# Altium PCB NBP12 Xilinx Spartan-IIE BGA456 Rev1.00.PcbDoc (part 2 of 2)
Units mm, origin at the board's own origin, x right, y up, seen from the top; angles counter-clockwise.
Board outline 69 x 80.99 mm, 4 copper layers (Top Layer, MidLayer1, InternalPlane1, Bottom Layer); 54 components, 265 nets, 866 pads, 396 vias.
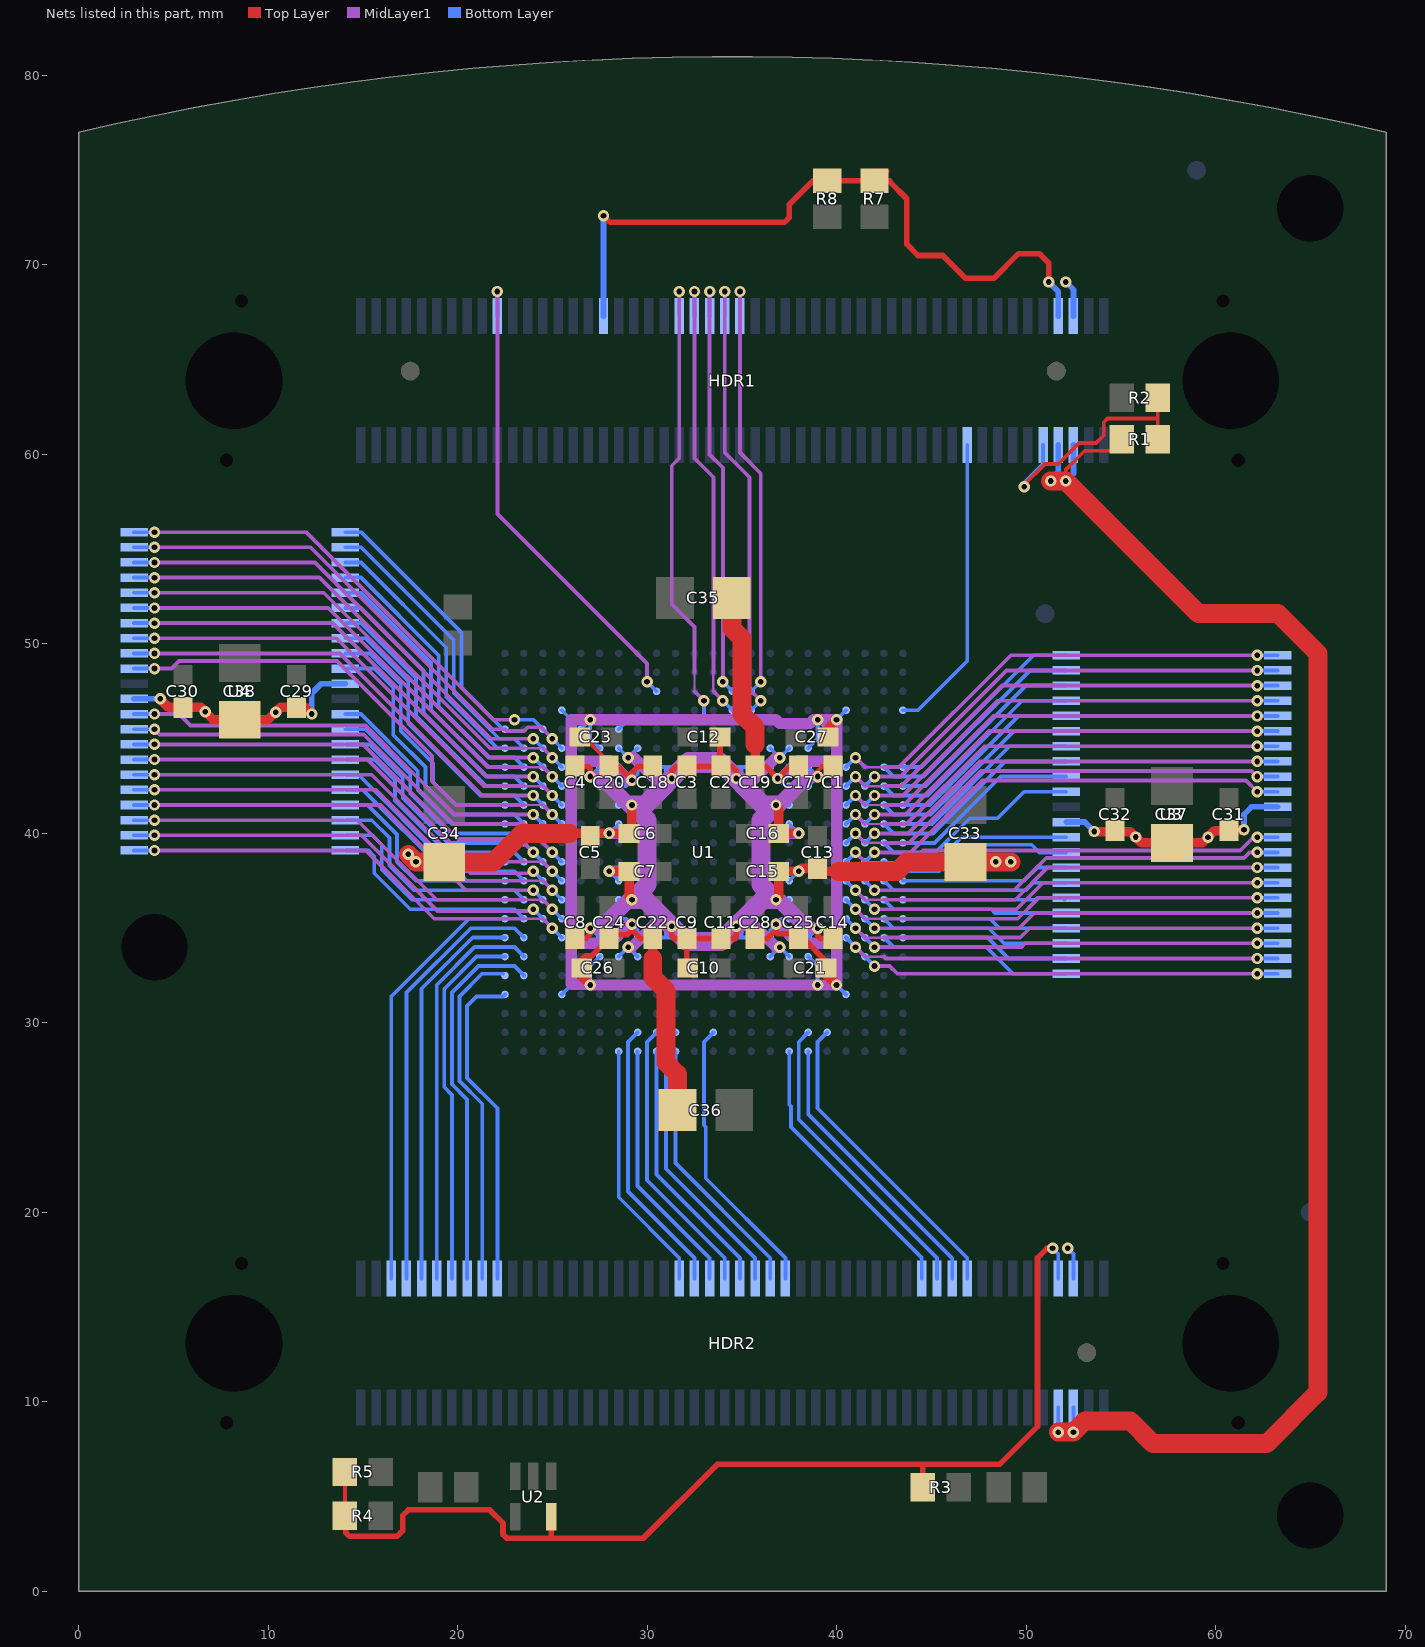
[diagram p4: the nets of this part, all layers, seen from the top]

## Via types
v1: diameter 0.6, hole 0.3, Top Layer to Bottom Layer, tented top, 396 vias

## Nets (pads, with @x,y where several pads share a name; then routed paths per layer and width w, separated by ;. In a path a pad name is that pad's centre, name@x,y a point inside that pad or via, vN(x,y) a via of type N, cw(c..) or ccw(c..) an arc to the next point about the centre after c; other vN are vias at no path point) (continued)
SP12: HDR2.82 U1.AA5 | length 16.5
  Bottom Layer w0.2: U1.AA5@39.5,29.5 39,29 39,25.5 46.9,17.6 HDR2.82@46.9,16.5
SP13: HDR2.80 U1.AB6 | length 15.1
  Bottom Layer w0.2: U1.AB6@38.5,28.5 38.5,25.2 46.1,17.6 HDR2.80@46.1,16.5
SP14: HDR2.78 U1.AA6 | length 16.2
  Bottom Layer w0.2: U1.AA6@38.5,29.5 38,29 38,24.9 45.3,17.6 HDR2.78@45.3,16.5
SP15: HDR2.76 U1.AB7 | length 14.9
  Bottom Layer w0.2: U1.AB7@37.5,28.5 37.5,25.7 37.6,25.6 37.6,24.5 44.5,17.6 HDR2.76@44.5,16.5
SPI_CLK: HDR1.46 U1.D10 | length 24.2
  MidLayer1 w0.127: 33.5,47.5 33.5,48.5
  MidLayer1 w0.2: v1(32.5,68.6) 32.5,59.8 33.5,58.8 33.5,48.5 ; 33.5,47.5 v1(34,47)
  Bottom Layer w0.2: HDR1.46@32.5,67.3 v1(32.5,68.6) ; v1(34,47) U1.D10@34.5,46.5
SPI_DIN: HDR1.44 U1.E16 | length 29.4
  MidLayer1 w0.127: 32.5,47.5 32.5,48.5
  MidLayer1 w0.2: v1(31.7,68.6) 31.7,59.8 31.3,59.4 31.3,52.1 32.5,50.9 32.5,48.5 ; 32.5,47.5 v1(33,47)
  Bottom Layer w0.2: U1.E16@28.5,45.5 29,46 32.8,46 33,46.2 v1(33,47) ; HDR1.44@31.7,67.3 v1(31.7,68.6)
SPI_DOUT: HDR1.50 U1.D9 | length 24.4
  MidLayer1 w0.2: v1(34.1,68.6) 34.1,60.1 35.4,58.8 35.4,47.6 v1(36,47)
  Bottom Layer w0.2: HDR1.50@34.1,67.3 v1(34.1,68.6) ; U1.D9@35.5,46.5 v1(36,47)
SPI_MODE: HDR1.52 U1.C9 | length 23.1
  MidLayer1 w0.2: v1(34.9,68.6) 34.9,60.1 36,59 v1(36,48)
  Bottom Layer w0.2: HDR1.52@34.9,67.3 v1(34.9,68.6) ; U1.C9@35.5,47.5 v1(36,48)
SPI_SEL: HDR1.48 U1.C10 | length 22.9
  MidLayer1 w0.2: v1(33.3,68.6) 33.3,60 34,59.3 v1(34,48)
  Bottom Layer w0.2: HDR1.48@33.3,67.3 v1(33.3,68.6) ; v1(34,48) U1.C10@34.5,47.5
SRAM0_A0: U1.J4 U3.5 | length 25.1
  MidLayer1 w0.127: 41.5,41.5 42.5,41.5
  MidLayer1 w0.2: v1(41,42) 41.5,41.5 ; 42.5,41.5 43.566,41.5 48.266,46.2 v1(62.2,46.2)
  Bottom Layer w0.2: U1.J4@40.5,41.5 v1(41,42) ; v1(62.2,46.2) U3.5@63.275,46.2
SRAM0_A1: U1.J3 U3.4 | length 24.1
  MidLayer1 w0.2: v1(42,42) 43.5,42 48.5,47 v1(62.2,47)
  Bottom Layer w0.2: U1.J3@41.5,41.5 v1(42,42) ; v1(62.2,47) U3.4@63.275,47
SRAM0_A2: U1.H4 U3.3 | length 25.4
  MidLayer1 w0.127: 41.5,42.5 42.5,42.5
  MidLayer1 w0.2: v1(41,43) 41.5,42.5 ; 42.5,42.5 43.434,42.5 48.734,47.8 v1(62.2,47.8)
  Bottom Layer w0.2: U1.H4@40.5,42.5 v1(41,43) ; v1(62.2,47.8) U3.3@63.275,47.8
SRAM0_A3: U1.H3 U3.2 | length 24.3
  MidLayer1 w0.2: v1(42,43) 43.369,43 48.969,48.6 v1(62.2,48.6)
  Bottom Layer w0.2: U1.H3@41.5,42.5 v1(42,43) ; v1(62.2,48.6) U3.2@63.275,48.6
SRAM0_A4: U1.G4 U3.1 | length 25.6
  MidLayer1 w0.127: 41.5,43.5 42.5,43.5
  MidLayer1 w0.2: v1(41,44) 41.5,43.5 ; 42.5,43.5 43.303,43.5 49.203,49.4 v1(62.2,49.4)
  Bottom Layer w0.2: U1.G4@40.5,43.5 v1(41,44) ; v1(62.2,49.4) U3.1@63.275,49.4
SRAM0_A5: U1.G1 U3.44 | length 11.1
  Bottom Layer w0.2: U1.G1@43.5,43.5 44.5,43.5 50.4,49.4 U3.44@52.125,49.4
SRAM0_A6: U1.G2 U3.43 | length 12.2
  Bottom Layer w0.2: U1.G2@42.5,43.5 43,43 44.6,43 50.2,48.6 U3.43@52.125,48.6
SRAM0_A7: U1.H1 U3.42 | length 10.8
  Bottom Layer w0.2: U1.H1@43.5,42.5 44.7,42.5 50,47.8 U3.42@52.125,47.8
SRAM0_A8: U1.P1 U3.28 | length 8.8
  Bottom Layer w0.2: U1.P1@43.5,36.5 50.5,36.5 50.6,36.6 U3.28@52.125,36.6 U3.28@52.025,36.5
SRAM0_A9: U1.P2 U3.27 | length 9.9
  Bottom Layer w0.2: U1.P2@42.5,36.5 43,36 48.163,36 48.363,35.8 U3.27@52.125,35.8
SRAM0_A10: U1.R1 U3.26 | length 8.8
  Bottom Layer w0.2: U1.R1@43.5,35.5 48.097,35.5 48.597,35 U3.26@52.125,35
SRAM0_A11: U1.R2 U3.25 | length 10.2
  Bottom Layer w0.2: U1.R2@42.5,35.5 43,35 48.031,35 48.831,34.2 U3.25@52.125,34.2
SRAM0_A12: U1.T1 U3.24 | length 9.1
  Bottom Layer w0.2: U1.T1@43.5,34.5 47.966,34.5 49.066,33.4 U3.24@52.125,33.4
SRAM0_A13: U1.T2 U3.23 | length 10.4
  Bottom Layer w0.2: U1.T2@42.5,34.5 43,34 47.9,34 49.3,32.6 U3.23@52.125,32.6
SRAM0_A14: U1.U3 U3.22 | length 22.1
  MidLayer1 w0.2: v1(42,33) 42.8,33 43.2,32.6 v1(62.2,32.6)
  Bottom Layer w0.2: U1.U3@41.5,33.5 v1(42,33) ; v1(62.2,32.6) U3.22@63.275,32.6
SRAM0_A15: U1.T4 U3.21 | length 23.2
  MidLayer1 w0.127: 41.5,33.5 42.5,33.5
  MidLayer1 w0.2: v1(41,34) 41.5,33.5 ; 42.5,33.5 42.6,33.4 v1(62.2,33.4)
  Bottom Layer w0.2: U1.T4@40.5,34.5 v1(41,34) ; v1(62.2,33.4) U3.21@63.275,33.4
SRAM0_A16: U1.T3 U3.20 | length 22.1
  MidLayer1 w0.2: v1(42,34) 49.76,34 49.96,34.2 v1(62.2,34.2)
  Bottom Layer w0.2: U1.T3@41.5,34.5 v1(42,34) ; v1(62.2,34.2) U3.20@63.275,34.2
SRAM0_A17: U1.R4 U3.19 | length 23.4
  MidLayer1 w0.127: 41.5,34.5 42.5,34.5
  MidLayer1 w0.2: v1(41,35) 41.5,34.5 ; 42.5,34.5 49.694,34.5 50.194,35 v1(62.2,35)
  Bottom Layer w0.2: U1.R4@40.5,35.5 v1(41,35) ; v1(62.2,35) U3.19@63.275,35
SRAM0_A18: U1.R3 U3.18 | length 22.3
  MidLayer1 w0.2: v1(42,35) 49.628,35 50.428,35.8 v1(62.2,35.8)
  Bottom Layer w0.2: U1.R3@41.5,35.5 v1(42,35) ; v1(62.2,35.8) U3.18@63.275,35.8
SRAM0_D0: U1.K4 U3.7 | length 24.9
  MidLayer1 w0.127: 41.5,40.5 42.5,40.5
  MidLayer1 w0.2: v1(41,41) 41.5,40.5 ; 42.5,40.5 43.697,40.5 47.797,44.6 v1(62.2,44.6)
  Bottom Layer w0.2: U1.K4@40.5,40.5 v1(41,41) ; v1(62.2,44.6) U3.7@63.275,44.6
SRAM0_D1: U1.L3 U3.8 | length 23.6
  MidLayer1 w0.2: v1(42,40) 43.763,40 46.034,42.271 47.563,43.8 v1(62.2,43.8)
  Bottom Layer w0.2: U1.L3@41.5,39.5 v1(42,40) ; v1(62.2,43.8) U3.8@63.275,43.8
SRAM0_D2: U1.L4 U3.9 | length 24.9
  MidLayer1 w0.127: 41.5,39.5 42.5,39.5
  MidLayer1 w0.2: v1(41,40) 41.5,39.5 ; 42.5,39.5 43.828,39.5 47.628,43.3 61.9,43.3 v1(62.2,43)
  Bottom Layer w0.2: U1.L4@40.5,39.5 v1(41,40) ; v1(62.2,43) U3.9@63.275,43
SRAM0_D3: U1.M3 U3.10 | length 23.8
  MidLayer1 w0.2: v1(42,39) 43.894,39 47.694,42.8 61.6,42.8 v1(62.2,42.2)
  Bottom Layer w0.2: U1.M3@41.5,38.5 v1(42,39) ; v1(62.2,42.2) U3.10@63.275,42.2
SRAM0_D4: U1.M4 U3.13 | length 23.8
  MidLayer1 w0.2: v1(41,39) 41.564,38.436 43.896,38.436 44.56,39.1 61.3,39.1 62,39.8 v1(62.2,39.8)
  Bottom Layer w0.2: U1.M4@40.5,38.5 v1(41,39) ; v1(62.2,39.8) U3.13@63.275,39.8
SRAM0_D5: U1.N3 U3.14 | length 22.8
  MidLayer1 w0.2: v1(42,37) 49.366,37 51.066,38.7 61.5,38.7 61.8,39 v1(62.2,39)
  Bottom Layer w0.2: U1.N3@41.5,37.5 v1(42,37) ; v1(62.2,39) U3.14@63.275,39
SRAM0_D6: U1.N4 U3.15 | length 23.9
  MidLayer1 w0.127: 41.5,36.5 42.5,36.5
  MidLayer1 w0.2: v1(41,37) 41.5,36.5 ; 42.5,36.5 49.431,36.5 51.131,38.2 v1(62.2,38.2)
  Bottom Layer w0.2: U1.N4@40.5,37.5 v1(41,37) ; v1(62.2,38.2) U3.15@63.275,38.2
SRAM0_D7: U1.P3 U3.16 | length 22.6
  MidLayer1 w0.2: v1(42,36) 49.497,36 50.897,37.4 v1(62.2,37.4)
  Bottom Layer w0.2: U1.P3@41.5,36.5 v1(42,36) ; v1(62.2,37.4) U3.16@63.275,37.4
SRAM0_D8: U1.N2 U3.29 | length 10
  Bottom Layer w0.2: U1.N2@42.5,37.5 43,37 50,37 50.4,37.4 U3.29@52.125,37.4
SRAM0_D9: U1.N1 U3.30 | length 8.9
  Bottom Layer w0.2: U1.N1@43.5,37.5 49.9,37.5 50.6,38.2 U3.30@52.125,38.2
SRAM0_D10: U1.M2 U3.31 | length 10.6
  Bottom Layer w0.2: U1.M2@42.5,38.5 43,38 45.4,38 46.8,39.4 50.3,39.4 50.7,39 U3.31@52.125,39
SRAM0_D11: U1.M1 U3.32 | length 9.2
  Bottom Layer w0.2: U1.M1@43.5,38.5 45.294,38.5 46.594,39.8 U3.32@52.125,39.8
SRAM0_D12: U1.L2 U3.35 | length 11.2
  Bottom Layer w0.2: U1.L2@42.5,39.5 43,39 45.228,39 47.028,40.8 48.5,40.8 49.9,42.2 U3.35@52.125,42.2
SRAM0_D13: U1.L1 U3.36 | length 10.1
  Bottom Layer w0.2: U1.L1@43.5,39.5 45.163,39.5 48.663,43 U3.36@52.125,43
SRAM0_D14: U1.K2 U3.37 | length 11.4
  Bottom Layer w0.2: U1.K2@42.5,40.5 43,40 45.097,40 48.897,43.8 U3.37@52.125,43.8
SRAM0_D15: U1.K1 U3.38 | length 10.3
  Bottom Layer w0.2: U1.K1@43.5,40.5 45.031,40.5 49.131,44.6 U3.38@52.125,44.6
SRAM0_E: U1.K3 U3.6 | length 23.8
  MidLayer1 w0.2: v1(42,41) 43.631,41 48.031,45.4 v1(62.2,45.4)
  Bottom Layer w0.2: U1.K3@41.5,40.5 v1(42,41) ; v1(62.2,45.4) U3.6@63.275,45.4
SRAM0_LB: U1.J2 U3.39 | length 11.7
  Bottom Layer w0.2: U1.J2@42.5,41.5 43,41 44.966,41 49.366,45.4 U3.39@52.125,45.4
SRAM0_OE: U1.H2 U3.41 | length 11.9
  Bottom Layer w0.2: U1.H2@42.5,42.5 43,42 44.8,42 49.8,47 U3.41@52.125,47
SRAM0_UB: U1.J1 U3.40 | length 10.6
  Bottom Layer w0.2: U1.J1@43.5,41.5 44.9,41.5 49.6,46.2 U3.40@52.125,46.2
SRAM0_W: U1.P4 U3.17 | length 23.6
  MidLayer1 w0.127: 41.5,35.5 42.5,35.5
  MidLayer1 w0.2: v1(41,36) 41.5,35.5 ; 42.5,35.5 49.563,35.5 50.663,36.6 v1(62.2,36.6)
  Bottom Layer w0.2: U1.P4@40.5,36.5 v1(41,36) ; v1(62.2,36.6) U3.17@63.275,36.6
SRAM1_A0: U1.G22 U4.5 | length 13.7
  Bottom Layer w0.2: U4.5@14.075,52.7 14.9,52.7 18.6,49 18.6,46.531 21.631,43.5 U1.G22@22.5,43.5
SRAM1_A1: U1.G21 U4.4 | length 15.2
  Bottom Layer w0.2: U4.4@14.075,53.5 14.9,53.5 19,49.4 19,46.697 21.697,44 23,44 U1.G21@23.5,43.5
SRAM1_A2: U1.F22 U4.3 | length 14
  Bottom Layer w0.2: U4.3@14.075,54.3 14.9,54.3 19.4,49.8 19.4,47.2 22.1,44.5 U1.F22@22.5,44.5
SRAM1_A3: U1.F21 U4.2 | length 15.5
  Bottom Layer w0.2: U4.2@14.075,55.1 14.9,55.1 19.8,50.2 19.8,47.4 22.2,45 23,45 U1.F21@23.5,44.5
SRAM1_A4: U1.E22 U4.1 | length 14.4
  Bottom Layer w0.2: U4.1@14.075,55.9 14.9,55.9 20.2,50.6 20.2,47.7 22.4,45.5 U1.E22@22.5,45.5
SRAM1_A5: U1.E20 U4.44 | length 26.6
  MidLayer1 w0.2: v1(4,55.9) 12,55.9 21.9,46 v1(23,46)
  Bottom Layer w0.2: U4.44@2.925,55.9 v1(4,55.9) ; v1(23,46) 24,46 ; 24,46 U1.E20@24.5,45.5 24,46
SRAM1_A6: U1.F19 U4.43 | length 27.1
  MidLayer1 w0.2: v1(4,55.1) 12.234,55.1 21.834,45.5 22.5,45.5 22.6,45.4 23.5,45.4 23.7,45.6 24.4,45.6 v1(25,45)
  Bottom Layer w0.2: U4.43@2.925,55.1 v1(4,55.1) ; v1(25,45) U1.F19@25.5,44.5
SRAM1_A7: U1.F20 U4.42 | length 25.6
  MidLayer1 w0.2: v1(4,54.3) 12.469,54.3 21.769,45 v1(24,45)
  Bottom Layer w0.2: U4.42@2.925,54.3 v1(4,54.3) ; v1(24,45) U1.F20@24.5,44.5
SRAM1_A8: U1.N20 U4.28 | length 24
  MidLayer1 w0.2: v1(4,43.1) 15.472,43.1 20.672,37.9 23.9,37.9 v1(24,38)
  Bottom Layer w0.2: U4.28@2.925,43.1 v1(4,43.1) ; v1(24,38) U1.N20@24.5,37.5
SRAM1_A9: U1.P19 U4.27 | length 25
  MidLayer1 w0.127: 23.5,37.5 24.5,37.5
  MidLayer1 w0.2: v1(4,42.3) 15.706,42.3 20.506,37.5 23.5,37.5 ; 24.5,37.5 v1(25,37)
  Bottom Layer w0.2: U4.27@2.925,42.3 v1(4,42.3) ; v1(25,37) U1.P19@25.5,36.5
SRAM1_A10: U1.P20 U4.26 | length 23.6
  MidLayer1 w0.2: v1(4,41.5) 15.94,41.5 20.44,37 v1(24,37)
  Bottom Layer w0.2: U4.26@2.925,41.5 v1(4,41.5) ; v1(24,37) U1.P20@24.5,36.5
SRAM1_A11: U1.R19 U4.25 | length 24.7
  MidLayer1 w0.127: 23.5,36.5 24.5,36.5
  MidLayer1 w0.2: v1(4,40.7) 14.7,40.7 18.9,36.5 23.5,36.5 ; 24.5,36.5 v1(25,36)
  Bottom Layer w0.2: U4.25@2.925,40.7 v1(4,40.7) ; v1(25,36) U1.R19@25.5,35.5
SRAM1_A12: U1.R20 U4.24 | length 23.5
  MidLayer1 w0.2: v1(4,39.9) 14.934,39.9 18.934,35.9 23.9,35.9 v1(24,36)
  Bottom Layer w0.2: U4.24@2.925,39.9 v1(4,39.9) ; v1(24,36) U1.R20@24.5,35.5
SRAM1_A13: U1.T19 U4.23 | length 24.5
  MidLayer1 w0.127: 23.5,35.5 24.5,35.5
  MidLayer1 w0.2: v1(4,39.1) 15.169,39.1 18.769,35.5 23.5,35.5 ; 24.5,35.5 v1(25,35)
  Bottom Layer w0.2: U4.23@2.925,39.1 v1(4,39.1) ; v1(25,35) U1.T19@25.5,34.5
SRAM1_A14: U1.R21 U4.22 | length 11.4
  Bottom Layer w0.2: U4.22@14.075,39.1 15.3,39.1 15.6,38.8 15.6,37.9 17.5,36 23,36 U1.R21@23.5,35.5
SRAM1_A15: U1.P22 U4.21 | length 10.6
  Bottom Layer w0.2: U4.21@14.075,39.9 15.5,39.9 16,39.4 16,38.1 17.6,36.5 U1.P22@22.5,36.5
SRAM1_A16: U1.P21 U4.20 | length 12
  Bottom Layer w0.2: U4.20@14.075,40.7 15.472,40.7 16.4,39.772 16.4,38.3 17.7,37 23,37 U1.P21@23.5,36.5
SRAM1_A17: U1.N22 U4.19 | length 10.9
  Bottom Layer w0.2: U4.19@14.075,41.5 15.237,41.5 16.8,39.937 16.8,38.5 17.8,37.5 U1.N22@22.5,37.5
SRAM1_A18: U1.N21 U4.18 | length 11.4
  Bottom Layer w0.2: U4.18@14.075,42.3 15.003,42.3 19.303,38 23,38 U1.N21@23.5,37.5
SRAM1_D0: U1.H22 U4.7 | length 13.2
  Bottom Layer w0.2: U4.7@14.075,51.1 14.9,51.1 17.8,48.2 17.8,46.2 21.5,42.5 U1.H22@22.5,42.5
SRAM1_D1: U1.J21 U4.8 | length 14.4
  Bottom Layer w0.2: U4.8@14.075,50.3 15.134,50.3 17.4,48.034 17.4,45.8 21.2,42 23,42 U1.J21@23.5,41.5
SRAM1_D2: U1.J22 U4.9 | length 13.8
  Bottom Layer w0.2: U4.9@14.075,49.5 15.369,49.5 17,47.869 17,45.4 18.7,43.7 18.7,42.7 19.9,41.5 U1.J22@22.5,41.5
SRAM1_D3: U1.K21 U4.10 | length 14.9
  Bottom Layer w0.2: U4.10@14.075,48.7 15.603,48.7 16.6,47.703 16.6,45.2 18.3,43.5 18.3,42.5 19.8,41 23,41 U1.K21@23.5,40.5
SRAM1_D4: U1.K22 U4.13 | length 11.4
  Bottom Layer w0.2: U4.13@14.075,46.3 14.9,46.3 17.9,43.3 17.9,42.3 19.7,40.5 U1.K22@22.5,40.5
SRAM1_D5: U1.L21 U4.14 | length 12.5
  Bottom Layer w0.2: U4.14@14.075,45.5 15.134,45.5 17.5,43.134 17.5,42.1 19.6,40 23,40 U1.L21@23.5,39.5
SRAM1_D6: U1.L22 U4.15 | length 11.2
  Bottom Layer w0.2: U4.15@14.075,44.7 15.369,44.7 17.1,42.969 17.1,41.9 19.5,39.5 U1.L22@22.5,39.5
SRAM1_D7: U1.M21 U4.16 | length 12.3
  Bottom Layer w0.2: U4.16@14.075,43.9 15.603,43.9 16.7,42.803 16.7,41.734 19.434,39 23,39 U1.M21@23.5,38.5
SRAM1_D8: U1.N19 U4.29 | length 25.2
  MidLayer1 w0.127: 23.5,38.5 24.5,38.5
  MidLayer1 w0.2: v1(4,43.9) 15.237,43.9 20.637,38.5 23.5,38.5 ; 24.5,38.5 v1(25,38)
  Bottom Layer w0.2: U4.29@2.925,43.9 v1(4,43.9) ; v1(25,38) U1.N19@25.5,37.5
SRAM1_D9: U1.M20 U4.30 | length 24.1
  MidLayer1 w0.2: v1(4,44.7) 15.003,44.7 20.003,39.7 23.3,39.7 v1(24,39)
  Bottom Layer w0.2: U4.30@2.925,44.7 v1(4,44.7) ; v1(24,39) U1.M20@24.5,38.5
SRAM1_D10: U1.M19 U4.31 | length 25.5
  MidLayer1 w0.2: v1(4,45.5) 4.275,45.225 15.044,45.225 19.769,40.5 23.5,40.5 v1(25,39)
  Bottom Layer w0.2: U4.31@2.925,45.5 v1(4,45.5) ; v1(25,39) U1.M19@25.5,38.5
SRAM1_D11: U1.K20 U4.32 | length 24
  MidLayer1 w0.2: v1(4,46.3) 5.3,46.3 5.9,45.7 15.134,45.7 17.634,43.2 19.834,41 v1(24,41)
  Bottom Layer w0.2: U4.32@2.925,46.3 v1(4,46.3) ; v1(24,41) U1.K20@24.5,40.5
SRAM1_D12: U1.K19 U4.35 | length 27.1
  MidLayer1 w0.127: 23.5,41.5 24.5,41.5
  MidLayer1 w0.2: v1(4,48.7) 4.9,48.7 5.3,49.1 13.634,49.1 18.649,44.085 18.649,42.751 19.9,41.5 23.5,41.5 ; 24.5,41.5 v1(25,41)
  Bottom Layer w0.2: U4.35@2.925,48.7 v1(4,48.7) ; v1(25,41) U1.K19@25.5,40.5
SRAM1_D13: U1.J20 U4.36 | length 24.9
  MidLayer1 w0.2: v1(4,49.5) 13.8,49.5 21.3,42 v1(24,42)
  Bottom Layer w0.2: U4.36@2.925,49.5 v1(4,49.5) ; v1(24,42) U1.J20@24.5,41.5
SRAM1_D14: U1.J19 U4.37 | length 26.2
  MidLayer1 w0.127: 23.5,42.5 24.5,42.5
  MidLayer1 w0.2: v1(4,50.3) 13.6,50.3 21.4,42.5 23.5,42.5 ; 24.5,42.5 v1(25,42)
  Bottom Layer w0.2: U4.37@2.925,50.3 v1(4,50.3) ; v1(25,42) U1.J19@25.5,41.5
SRAM1_D15: U1.H20 U4.38 | length 25.1
  MidLayer1 w0.2: v1(4,51.1) 13.406,51.1 21.506,43 v1(24,43)
  Bottom Layer w0.2: U4.38@2.925,51.1 v1(4,51.1) ; v1(24,43) U1.H20@24.5,42.5
SRAM1_E: U1.H21 U4.6 | length 14.6
  Bottom Layer w0.2: U4.6@14.075,51.9 14.9,51.9 18.2,48.6 18.2,46.366 21.566,43 23,43 U1.H21@23.5,42.5
SRAM1_LB: U1.H19 U4.39 | length 26.5
  MidLayer1 w0.127: 23.5,43.5 24.5,43.5
  MidLayer1 w0.2: v1(4,51.9) 13.172,51.9 21.572,43.5 23.5,43.5 ; 24.5,43.5 v1(25,43)
  Bottom Layer w0.2: U4.39@2.925,51.9 v1(4,51.9) ; v1(25,43) U1.H19@25.5,42.5
SRAM1_OE: U1.G19 U4.41 | length 26.7
  MidLayer1 w0.127: 23.5,44.5 24.5,44.5
  MidLayer1 w0.2: v1(4,53.5) 12.703,53.5 21.703,44.5 23.5,44.5 ; 24.5,44.5 v1(25,44)
  Bottom Layer w0.2: U4.41@2.925,53.5 v1(4,53.5) ; v1(25,44) U1.G19@25.5,43.5
SRAM1_UB: U1.G20 U4.40 | length 25.4
  MidLayer1 w0.2: v1(4,52.7) 12.937,52.7 21.637,44 v1(24,44)
  Bottom Layer w0.2: U4.40@2.925,52.7 v1(4,52.7) ; v1(24,44) U1.G20@24.5,43.5
SRAM1_W: U1.M22 U4.17 | length 10.3
  Bottom Layer w0.2: U4.17@14.075,43.1 14.769,43.1 19.369,38.5 U1.M22@22.5,38.5
SW0: HDR2.44 U1.AB16 | length 13.3
  Bottom Layer w0.2: U1.AB16@28.5,28.5 28.5,20.8 31.7,17.6 HDR2.44@31.7,16.5
SW1: HDR2.46 U1.AA15 | length 14.7
  Bottom Layer w0.2: U1.AA15@29.5,29.5 29,29 29,21.1 32.5,17.6 HDR2.46@32.5,16.5
SW2: HDR2.48 U1.AB15 | length 13.6
  Bottom Layer w0.2: U1.AB15@29.5,28.5 29.5,21.4 33.3,17.6 HDR2.48@33.3,16.5
SW3: HDR2.50 U1.AA14 | length 14.9
  Bottom Layer w0.2: U1.AA14@30.5,29.5 30,29 30,21.7 34.1,17.6 HDR2.50@34.1,16.5
SW4: HDR2.52 U1.AB14 | length 13.8
  Bottom Layer w0.2: U1.AB14@30.5,28.5 30.5,22 34.9,17.6 HDR2.52@34.9,16.5
SW5: HDR2.54 U1.AA13 | length 15.2
  Bottom Layer w0.2: U1.AA13@31.5,29.5 31,29 31,22.3 35.7,17.6 HDR2.54@35.7,16.5
SW6: HDR2.56 U1.AB13 | length 14.1
  Bottom Layer w0.2: U1.AB13@31.5,28.5 31.5,22.6 36.5,17.6 HDR2.56@36.5,16.5
SW7: HDR2.58 U1.AA11 | length 15
  Bottom Layer w0.2: U1.AA11@33.5,29.5 33,29 33,24.6 33.1,24.5 33.1,21.8 37.3,17.6 HDR2.58@37.3,16.5
SWC0: HDR2.18 U1.V22 | length 18.2
  Bottom Layer w0.2: HDR2.18@21.3,16.5 21.3,25.731 20.1,26.931 20.1,31.4 21.3,32.6 U1.V22@22.4,32.6
SWC1: HDR2.16 U1.V21 | length 20
  Bottom Layer w0.2: HDR2.16@20.5,16.5 20.5,25.966 19.7,26.766 19.7,31.6 21.1,33 23,33 U1.V21@23.5,32.5
SWC2: HDR2.14 U1.U22 | length 19.4
  Bottom Layer w0.2: HDR2.14@19.7,16.5 19.7,26.2 19.3,26.6 19.3,31.8 21,33.5 U1.U22@22.5,33.5
SWC3: HDR2.6 U1.R22 | length 22.6
  Bottom Layer w0.2: HDR2.6@16.5,16.5 16.5,31.4 20.6,35.5 U1.R22@22.5,35.5
SWR0: HDR2.20 U1.W22 | length 17.3
  Bottom Layer w0.2: HDR2.20@22.1,16.5 22.1,25.497 20.5,27.097 20.5,30.9 21,31.4 22.4,31.4 U1.W22@22.5,31.5
SWR1: HDR2.12 U1.U21 | length 21.1
  Bottom Layer w0.2: HDR2.12@18.9,16.5 18.9,32 20.9,34 23,34 U1.U21@23.5,33.5
SWR2: HDR2.10 U1.T22 | length 20.8
  Bottom Layer w0.2: HDR2.10@18.1,16.5 18.1,31.8 20.8,34.5 U1.T22@22.5,34.5
SWR3: HDR2.8 U1.T21 | length 22.9
  Bottom Layer w0.2: HDR2.8@17.3,16.5 17.3,31.6 20.7,35 23,35 U1.T21@23.5,34.5
TEST: HDR1.81 U1.D1 | length 15.9
  Bottom Layer w0.2: U1.D1@43.5,46.5 44.3,46.5 46.9,49.1 HDR1.81@46.9,60.5
VCC: C1.2 C2.2 C3.2 C4.2 C5.2 C6.2 C7.2 C8.2 C9.2 C10.2 C11.2 C12.2 C13.2 C14.2 C15.2 C16.2 C29.2 C30.2 C31.2 C32.2 C33.1 C34.1 C37.1 C38.1 HDR1.34 HDR1.94 HDR1.96 HDR2.94 HDR2.96 R3.1 R4.1 R5.1 R7.1 R8.1 U1.F7 U1.F8 U1.F15 U1.F16 U1.G6 U1.G9 U1.G10 U1.G13 U1.G14 U1.G17 U1.H6 U1.H17 U1.J7 U1.J16 U1.K7 U1.K16 U1.N7 U1.N16 U1.P7 U1.P16 U1.R6 U1.R17 U1.T6 U1.T9 U1.T10 U1.T13 U1.T14 U1.T17 U1.U7 U1.U8 U1.U15 U1.U16 U2.5 U3.11 U3.33 U4.11 U4.33 | length 272.9
  Top Layer w0.2: R4.1@14.05,4 R5.1@14.05,6.3 ; v1(39,43) 39,43.3 39.25,43.55
  Top Layer w0.3: R4.1@14.05,4 14.1,3.95 14.1,3.1 14.3,2.9 16.8,2.9 17.1,3.2 17.1,4 17.4,4.3 21.7,4.3 22.4,3.6 22.4,3 22.6,2.8 29.8,2.8 33.7,6.7 48.6,6.7 50.6,8.7 50.6,17.6 51.1,18.1 v1(51.4,18.1) ; 24.9,2.8 24.95,2.85 U2.5@24.95,3.925 ; C4.2@26.2,43.55 26.85,43.55 27,43.4 v1(27,43) ; 26.75,34.45 27,34.7 v1(27,35) ; v1(27.7,72.6) 28.05,72.25 37.25,72.25 37.5,72.5 37.5,73.2 38.75,74.45 R8.1@39.5,74.45 42.8,74.45 42.8,74.4 43.7,73.5 43.7,71.1 44.3,70.5 45.6,70.5 46.8,69.3 48.3,69.3 49.6,70.6 50.7,70.6 51.2,70.1 v1(51.2,69.1) ; v1(31.3,35.1) 31.3,34.6 31.45,34.45 C9.2@32.1,34.45 ; v1(31.3,42.9) 31.3,43.3 31.55,43.55 C3.2@32.1,43.55 C2.2@33.9,43.55 34.45,43.55 34.7,43.3 v1(34.7,42.9) ; C10.2@32.15,32.9 32.1,32.95 C9.2@32.1,34.45 ; C2.2@33.85,43.6 C12.2@33.85,45.1 ; v1(34.7,35.1) 34.7,34.5 34.65,34.45 C11.2@33.9,34.45 C9.2@32.1,34.45 ; v1(38,38) v1@38.15,38.15 ; v1(39,35) 39,34.6 39.15,34.45 C14.2@39.8,34.45 ; 39.25,43.55 C1.2@39.8,43.55 ; R7.1@42,74.95 R7.1@42.65,74.95 ; R3.1@44.55,5.5 44.55,6.65
  Top Layer w0.5: v1(4.3,47.1) 4.75,46.65 C30.2@5.5,46.65 6.45,46.65 7.1,46 C38.1@8.5,46 10,46 10.65,46.65 11.95,46.65 v1(12.3,46.3) ; 25.9,40 26.85,40 C5.2@27,39.85 27.15,40 C6.2@29.05,40 29.2,40.15 v1(29.2,41.5) ; v1(28,38) C7.2@29.05,38 29.05,36.65 v1(29.2,36.5) ; v1(36.8,36.5) 36.95,36.65 C15.2@36.95,38 v1(38,38) ; v1(36.8,41.5) 36.95,41.35 C16.2@36.95,40 v1(38,40) ; v1@38.15,38.15 C13.2@39,38.15 39.15,38 40.1,38 ; C33.1@46.8,38.5 v1(48.4,38.5) ; v1(53.6,40.1) 54.65,40.1 55.5,40.1 56.1,39.5 C37.1@57.7,39.5 59.3,39.5 59.95,40.15 C31.2@60.7,40.15 60.75,40.2 v1(61.5,40.2)
  Top Layer w1: v1(17.4,38.9) v1(17.8,38.5) 21.9,38.5 23.4,40 25.9,40 ; 40.1,38 43.2,38 43.7,38.5 C33.1@46.8,38.5 v1(48.4,38.5) v1(49.2,38.5)
  MidLayer1 w0.6: v1(27,35) 27.7,35 v1(29.2,36.5) ; v1(27,43) 27.7,43 29.8,40.9 ; 27.4,35 29.05,36.65 v1@29.2,36.8 ; 27.4,43 v1@29.1,41.3 ; v1(28,38) 29.8,38 ; v1(28,40) 29.8,40 ; v1(29,34) 29.2,34 30.8,35.6 ; v1(29,44) 29.3,44 30.841,42.459 30.841,42.441 ; v1(31.3,42.9) 31.9,43.5 34.1,43.5 v1(34.7,42.9) ; 35.202,35.602 35.202,35.598 36.8,34 v1(37,34) ; 35.22,42.38 35.22,42.42 36.8,44 v1(37,44) ; 36.2,40 v1(38,40) ; 36.8,41.2 36.95,41.35 38.6,43 ; v1(36.8,41.5) 38.3,43 v1(39,43) ; 38.6,35 37.1,36.5 v1(36.8,36.5) 38.3,35 v1(39,35)
  MidLayer1 w1: v1(29.2,36.5) 30,37.3 30,40.7 v1(29.2,41.5) 29.9,41.5 32.2,43.8 33.8,43.8 36.1,41.5 v1(36.8,41.5) 36,40.7 36,37.3 v1(36.8,36.5) 36.1,36.5 33.9,34.3 32.1,34.3 29.9,36.5 v1(29.2,36.5)
  Bottom Layer w0.2: U1.T17@27.5,34.5 v1(27,35) U1.R17@27.5,35.5 ; U1.H17@27.5,42.5 v1(27,43) U1.G17@27.5,43.5 ; v1(28,38) U1.N16@28.5,37.5 ; v1(28,40) U1.K16@28.5,40.5 ; U1.U16@28.5,33.5 v1(29,34) U1.U15@29.5,33.5 ; U1.P16@28.5,36.5 v1(29.2,36.5) ; U1.J16@28.5,41.5 v1(29.2,41.5) ; U1.F16@28.5,44.5 v1(29,44) U1.F15@29.5,44.5 ; U1.T14@30.5,34.5 U1.T13@31.5,34.5 ; U1.G14@30.5,43.5 U1.G13@31.5,43.5 ; 31,34.5 31,34.8 v1(31.3,35.1) ; 31,43.5 31,43.2 v1(31.3,42.9) ; U1.T10@34.5,34.5 U1.T9@35.5,34.5 ; U1.G10@34.5,43.5 U1.G9@35.5,43.5 ; v1(34.7,35.1) 35,34.8 35,34.5 ; v1(34.7,42.9) 35,43.2 35,43.5 ; U1.U8@36.5,33.5 v1(37,34) U1.U7@37.5,33.5 ; U1.F8@36.5,44.5 v1(37,44) U1.F7@37.5,44.5 ; v1(36.8,36.5) U1.P7@37.5,36.5 ; v1(36.8,41.5) U1.J7@37.5,41.5 ; U1.N7@37.5,37.5 v1(38,38) ; U1.K7@37.5,40.5 v1(38,40) ; U1.T6@38.5,34.5 v1(39,35) U1.R6@38.5,35.5 ; U1.H6@38.5,42.5 v1(39,43) U1.G6@38.5,43.5 ; v1(51.4,18.1) 51.7,17.8 HDR2.94@51.7,16.5 ; v1(52.2,18.1) 52.5,17.8 HDR2.96@52.5,16.5
  Bottom Layer w0.3: U4.33@2.925,47.1 v1(4.3,47.1) ; 12.3,46.6 12.3,47.4 12.8,47.9 U4.11@14.075,47.9 ; HDR1.34@27.7,67.3 v1(27.7,72.6) ; v1(51.2,69.1) 51.7,68.6 HDR1.94@51.7,67.3 ; v1(52.1,69.1) 52.5,68.7 HDR1.96@52.5,67.3 ; U3.33@52.125,40.6 53.1,40.6 v1(53.6,40.1) ; v1(61.5,40.2) 61.5,41 61.9,41.4 U3.11@63.275,41.4
  other v1: 55.786,39.814 59.6,39.8 10.4,46.4 6.679,46.421
VCCINT: C17.2 C18.2 C19.2 C20.2 C21.2 C22.2 C23.2 C24.2 C25.2 C26.2 C27.2 C28.2 C35.1 C36.1 HDR1.93 HDR1.95 HDR2.93 HDR2.95 R1.1 U1.D4 U1.D19 U1.E5 U1.E18 U1.F6 U1.F17 U1.G7 U1.G8 U1.G15 U1.G16 U1.H7 U1.H16 U1.R7 U1.R16 U1.T7 U1.T8 U1.T15 U1.T16 U1.U6 U1.U17 U1.V5 U1.V18 U1.W4 U1.W19 | length 222.3
  Top Layer w0.2: C23.2@26.65,45.1 C20.2@28.1,43.65 ; v1(52.1,58.6) 52.1,59.2 53.1,60.2 54.45,60.2 R1.1@55.05,60.8
  Top Layer w0.3: C26.2@26.55,33.35 26.75,33.55 27.1,33.55 28.198,34.648 28.948,34.648 v1@29.2,34.9 ; C20.2@28.45,43.55 v1(29.2,42.8) 29.2,43.2 29.55,43.55 C18.2@30.3,43.55 ; v1(29.2,35.2) v1@29.2,34.9 ; C22.2@30.3,34.45 29.65,34.45 29.2,34.9 ; C28.2@35.7,34.45 36.35,34.45 36.8,34.9 ; C19.2@35.7,43.55 36.25,43.55 v1(36.9,42.9) C17.2@37.55,43.55 ; v1(36.8,35.2) 36.8,34.8 36.9,34.7 38,34.7 C25.2@38,34.45 38.25,34.45 C21.2@39.45,33.25
  Top Layer w0.5: C26.2@26.55,32.9 26.55,32.45 v1(27,32) ; C22.2@30.3,33.9 C22.2@30.3,34.45 ; C19.2@35.7,43.55 35.7,44.3 ; C21.2@39.45,32.9 39.45,32.55 v1(39.997,32.003) ; C27.2@39.55,45.1 39.55,45.55 v1(40,46)
  Top Layer w1: 30.3,33.4 30.3,32.4 31,31.7 31,27.9 31.6,27.3 C36.1@31.6,25.4 ; C35.1@34.471,52.429 34.471,50.829 35,50.3 35,46.3 35.7,45.6 35.7,44.7 ; v1(51.3,58.6) v1(52.1,58.6) 59.1,51.6 63.3,51.6 65.4,49.5 65.4,10.5 62.7,7.8 56.7,7.8 55.5,9 53.1,9 v1(52.5,8.4) v1(51.7,8.4)
  MidLayer1 w0.6: 26,32.059 26,36.3 26,41.7 26,46 ; 26,34.2 28.031,34.2 29.031,35.2 v1(29.2,35.2) ; 26,43.8 28.031,43.8 29.031,42.8 v1(29.2,42.8) ; 26.029,32.029 v1@26.97,32.029 ; 26.031,46 35.869,46 36.8,46 37,45.8 38.6,45.8 38.8,46 v1(40,46) ; 29,32 v1(27,32) v1@40,32 ; v1(36.8,35.2) 36.969,35.2 37.969,34.2 40,34.2 ; v1@40,32.005 40,34.2 ; 40,43.8 37.969,43.8 v1@37.069,42.9 ; v1@40,45.831 v1(40,46) ; v1@37.069,42.9 v1(36.9,42.9) v1@37.069,42.9 ; 40,34.2 v1(40,46)
  Bottom Layer w0.2: U1.W19@25.5,31.5 26,32 v1(27,32) ; U1.D19@25.5,46.5 26,46 v1(27,46) ; U1.V18@26.5,32.5 v1(27,32) ; U1.E18@26.5,45.5 v1(27,46) ; U1.U17@27.5,33.5 27,33 v1(27,32) ; U1.F17@27.5,44.5 27,45 v1(27,46) ; U1.R16@28.5,35.5 28.9,35.5 v1(29.2,35.2) ; U1.H16@28.5,42.5 28.9,42.5 v1(29.2,42.8) ; U1.G16@28.5,43.5 v1(29.2,42.8) ; U1.T16@28.6,34.6 U1.T16@28.5,34.5 v1(29.2,35.2) ; U1.T15@29.5,34.5 29.5,34.9 v1(29.2,35.2) ; U1.G15@29.5,43.5 29.5,43.1 v1(29.2,42.8) ; U1.T8@36.5,34.5 36.5,34.9 v1(36.8,35.2) ; U1.G8@36.5,43.5 36.5,43.3 v1(36.9,42.9) ; U1.T7@37.5,34.5 v1(36.8,35.2) ; U1.R7@37.5,35.5 37.1,35.5 v1(36.8,35.2) ; U1.H7@37.5,42.5 37.3,42.5 v1(36.9,42.9) ; U1.G7@37.5,43.5 v1(36.9,42.9) ; U1.U6@38.5,33.5 39,33 ; U1.F6@38.5,44.5 39,45 v1(39,46) ; v1@39,32.2 39,33 ; U1.V5@39.5,32.5 v1(39.997,32.003) ; U1.E5@39.5,45.5 v1(39,46) ; v1@39.995,32 v1(39,32) 39,33 ; v1@40,32 U1.W4@40.5,31.5 ; U1.D4@40.5,46.5 v1(40,46) v1(39,46) ; v1(51.7,8.4) HDR2.93@51.7,9.7 ; v1(52.5,8.4) HDR2.95@52.5,9.7
  Bottom Layer w0.3: v1(51.3,58.6) 51.7,59 HDR1.93@51.7,60.5 ; v1(52.1,58.6) 52.5,59 HDR1.95@52.5,60.5
VDRIVE: HDR1.20 U1.C14 | length 25.9
  MidLayer1 w0.2: v1(22.1,68.6) 22.1,56.86 30,48.96 v1(30,48)
  Bottom Layer w0.2: HDR1.20@22.1,67.3 v1(22.1,68.6) ; v1(30,48) U1.C14@30.5,47.5
VREF: HDR1.91 R1.2 R2.1 | length 13.6
  Top Layer w0.2: v1(49.9,58.3) 49.9,58.4 51,59.5 51.7,59.5 52.8,60.6 53.7,60.6 54.1,61 54.1,61.7 54.3,61.9 56.9,61.9 56.95,61.95 ; R1.2@56.95,60.8 56.95,61.95 ; R2.1@56.95,63 56.95,61.95
  Bottom Layer w0.2: v1@49.9,58.5 50.9,59.5 HDR1.91@50.9,60.5
pads on no net: HDR1.MH1 HDR1.MH2 HDR1.MH3 HDR1.MH4 HDR1.MH5 HDR1.MH6 HDR2.MH1 HDR2.MH2 HDR2.MH3 HDR2.MH4 HDR2.MH5 HDR2.MH6 U1.C4 U1.D3 U1.D5 U1.D6 U1.D7 U1.D8 U1.D11 U1.D20 U1.D21 U1.D22 U1.E7 U1.E8 U1.E9 U1.E10 U1.E11 U1.E12 U1.E13 U1.E14 U1.E15 U1.E17 U1.E19 U1.E21 U1.F5 U1.F9 U1.F10 U1.F11 U1.F12 U1.F13 U1.F14 U1.F18 U1.G5 U1.G18 U1.H5 U1.H18 U1.J5 U1.J6 U1.J17 U1.J18 U1.K5 U1.K6 U1.K17 U1.K18 U1.L5 U1.L6 U1.L17 U1.L18 U1.L19 U1.L20 U1.M5 U1.M6 U1.M17 U1.M18 U1.N5 U1.N6 U1.N17 U1.N18 U1.P5 U1.P6 U1.P17 U1.P18 U1.R5 U1.R18 U1.T5 U1.T18 U1.U4 U1.U9 U1.U10 U1.U11 U1.U12 U1.U13 U1.U14 U1.V6 U1.V7 U1.V8 U1.V9 U1.V10 U1.V11 U1.V12 U1.V13 U1.V14 U1.V15 U1.V16 U1.V17 U2.1

## Polygon pours and split planes (outlines as drawn)
GND on Top Layer "Top Layer-GND" (solid, remove dead copper, pour order 1001): 0,0 0,82.2 69,82.2 69,0
VCCINT on Top Layer "Top Layer-VCCINT" (solid, remove dead copper, pour order 1000): 23,29 23,49.019 43,49.019 43,29
VCC on MidLayer1 "MidLayer1-VCC" (solid, remove dead copper, pour order 1003): 0,0 0,82.9 69,82.9 69,0
VCCINT on MidLayer1 "MidLayer1-VCCINT" (solid, remove dead copper, pour order 1002): 24,48 24,30 42,30 42,47.999 23.987,47.999
GND on Bottom Layer "Bottom Layer-GND" (solid, remove dead copper, pour order 1004): 0,0.1 0,82.2 69,82.2 69,0 0,0
GND on InternalPlane1 (split plane): 36.237,80.589 37.974,80.559 39.71,80.509 41.446,80.439 43.181,80.348 44.914,80.238 46.647,80.108 48.377,79.957 50.106,79.787 51.833,79.597 53.557,79.387 55.279,79.157 56.998,78.907 58.714,78.637 60.427,78.347 62.136,78.038 63.842,77.709 65.543,77.36 67.241,76.992 68.598,76.681 68.598,0.402 0.402,0.402 0.403,76.681 1.759,76.992 3.457,77.36 5.158,77.709 6.864,78.038 8.573,78.347 10.286,78.637 12.002,78.907 13.721,79.157 15.443,79.387 17.167,79.597 18.894,79.787 20.623,79.957 22.353,80.108 24.086,80.238 25.819,80.348 27.554,80.439 29.29,80.509 31.026,80.559 32.763,80.589 34.5,80.599
VCC on InternalPlane1 (split plane): 52.698,69.258 52.698,69 52.698,68.8 52.698,65.342 51.658,64.302 45.6,64.302 45.561,64.294 45.528,64.272 42.849,61.593 42.826,61.56 42.819,61.521 42.819,55.863 35.428,48.472 35.406,48.439 35.398,48.4 35.398,46.5 35.406,46.461 35.428,46.428 35.498,46.358 35.498,43 35.498,42.9 35.498,42.542 35.258,42.302 34.242,42.302 34.002,42.542 34.002,42.7 34.002,43 33.994,43.039 33.972,43.072 33.672,43.372 33.639,43.394 33.6,43.402 32.5,43.402 32.461,43.394 32.428,43.372 32.128,43.072 32.106,43.039 32.098,43 32.098,42.542 31.858,42.302 30.842,42.302 30.602,42.542 30.602,43.358 31.142,43.898 33.2,43.898 33.239,43.906 33.272,43.928 34.472,45.128 34.494,45.161 34.502,45.2 34.502,46.358 34.597,46.453 34.619,46.486 34.627,46.525 34.627,48.475 34.627,48.525 34.619,48.564 34.597,48.597 34.502,48.692 34.502,48.9 34.502,50.158 40.605,56.261 40.627,56.294 40.635,56.333 40.635,62.491 44.642,66.498 49.7,66.498 49.739,66.506 49.772,66.528 50.372,67.128 50.472,67.228 50.494,67.261 50.502,67.3 50.502,69.258 50.842,69.598 52.358,69.598
VCC on InternalPlane1 (split plane): 60.798,40.458 60.798,39.442 60.258,38.902 57,38.902 56.961,38.894 56.928,38.872 56.228,38.172 56.206,38.139 56.198,38.1 56.198,24 56.198,22.742 52.828,19.372 52.806,19.339 52.798,19.3 52.798,19 52.798,17.942 52.358,17.502 51.242,17.502 50.902,17.842 50.902,18.5 50.902,19.358 54.572,23.028 54.594,23.061 54.602,23.1 54.602,36.4 54.594,36.439 54.572,36.472 53.572,37.472 53.539,37.494 53.5,37.502 47.742,37.502 47.402,37.842 47.402,39.058 47.742,39.398 51.2,39.398 51.239,39.406 51.272,39.428 52.942,41.098 60.158,41.098
VCC on InternalPlane1 (split plane): 18.798,40.458 18.798,39.9 18.798,38.6 18.798,38.242 18.228,37.672 18.058,37.502 17.642,37.502 17.472,37.672 11.972,43.172 9.472,45.672 9.439,45.694 9.4,45.702 6.342,45.702 5.702,46.342 5.702,46.858 6.142,47.298 11.958,47.298
VCCINT on InternalPlane1 (split plane): 52.598,58.858 52.598,58.242 51.928,57.572 49.858,55.502 48.4,55.502 48.361,55.494 48.328,55.472 41.528,48.672 41.506,48.639 41.498,48.6 41.498,46.842 41.358,46.702 40.9,46.702 40.861,46.694 40.828,46.672 40.628,46.472 40.428,46.272 40.406,46.239 40.398,46.2 40.398,45.442 37.358,42.402 36.542,42.402 36.402,42.542 36.402,43.1 36.402,43.258 36.542,43.398 37.1,43.398 37.139,43.406 37.172,43.428 37.663,43.919 37.685,43.952 37.693,43.991 37.693,44.191 37.693,45.749 39.342,47.398 40.2,47.398 40.239,47.406 40.272,47.428 40.572,47.728 40.594,47.761 40.602,47.8 40.602,49.858 47.542,56.798 49.4,56.798 49.439,56.806 49.472,56.828 50.772,58.128 50.794,58.161 50.802,58.2 50.802,58.6 50.802,58.858 51.042,59.098 52.358,59.098

## Keep-outs
Top Layer:
  circle w0.1: c17.5,64.4 r1.5
  circle w0.1: c51.6,64.4 r1.5
  circle w0.1: c53.2,12.6 r1.5
Bottom Layer:
  circle w0.1: c65,20 r1.5
  circle w0.1: c51,51.6 r1.5
  circle w0.1: c59,75 r1.5
Keep-Out Layer:
  the board outline again, w0.8

## Other copper
InternalPlane1 (plane layer: these items are gaps in the copper):
  lines w0.2: 11.4,47.4 12,47.4 ; 18.9,39.9 18.9,40.5 ; 32.9,44 33.2,44 ; 41.2,46.4 40.7,46.4 ; 12,47.4 18.9,40.5 ; 12,47.4 6.1,47.4 5.6,46.9 5.6,46.3 6.3,45.6 8.5,45.6 9.4,45.6 11.9,43.1 17.4,37.6 17.6,37.4 18.1,37.4 18.3,37.6 18.9,38.2 18.9,38.6 18.9,40.5 ; 30.5,43.4 30.5,42.5 30.8,42.2 31.1,42.2 31.9,42.2 32.2,42.5 32.2,43 32.5,43.3 33.4,43.3 33.6,43.3 33.9,43 33.9,42.7 33.9,42.5 34.2,42.2 35.3,42.2 35.6,42.5 35.6,42.9 35.6,43 35.6,46.4 35.5,46.5 35.5,48.4 42.921,55.82 42.921,61.521 45.6,64.2 48.2,64.2 51.7,64.2 52.8,65.3 52.8,68.8 52.8,69 52.8,69.3 52.4,69.7 50.8,69.7 50.4,69.3 50.4,67.3 50.3,67.2 49.7,66.6 47.7,66.6 44.6,66.6 40.533,62.533 40.533,56.333 34.4,50.2 34.4,48.9 34.4,48.65 34.525,48.525 34.525,48.475 34.525,46.525 34.4,46.4 34.4,45.2 33.2,44 ; 30.5,43.4 31.1,44 ; 30.5,43.4 31.1,44 ; 31.1,44 33.2,44 ; 37.591,43.991 37.591,44.191 ; 37.591,43.991 37.591,44.191 ; 37.591,43.991 37.1,43.5 36.7,43.5 36.5,43.5 36.3,43.3 36.3,43.1 36.3,42.5 36.5,42.3 37.4,42.3 40.5,45.4 40.5,46.2 40.7,46.4 ; 37.591,44.191 37.591,45.791 39.3,47.5 40.2,47.5 40.5,47.8 40.5,49.9 47.5,56.9 49.4,56.9 50.7,58.2 50.7,58.6 50.7,58.9 51,59.2 52.4,59.2 52.7,58.9 52.7,58.2 52,57.5 49.9,55.4 48.4,55.4 41.6,48.6 41.6,46.8 41.4,46.6 ; 40.7,46.4 40.9,46.6 41.4,46.6 ; 41.4,46.6 41.4,46.6 ; 47.3,37.8 47.3,39.1 47.7,39.5 48.9,39.5 51.2,39.5 52.9,41.2 60.2,41.2 60.9,40.5 60.9,39.4 60.3,38.8 57,38.8 56.3,38.1 56.3,24 56.3,22.7 52.9,19.3 52.9,19 52.9,17.9 52.4,17.4 51.2,17.4 50.8,17.8 50.8,18.5 50.8,19.4 54.5,23.1 54.5,36.4 53.5,37.4 47.7,37.4 47.3,37.8

## Silkscreen, mask and mechanical layers (free items; w line width, h text height)
Top Overlay:
  lines w0.08: 25,45.8 25.5,45.3 25.5,43.5 ; 27.3,41.9 27.3,41.6 27.5,41.4 ; 28.5,36.9 28.7,36.7 28.7,36.1 ; 30.7,38.7 30.8,38.7 30.9,38.6 31.2,38.6 ; 30.7,40.7 30.8,40.7 30.9,40.6 31.2,40.6 ; 30.9,45.8 31.4,45.3 31.4,43.5 ; 31,33.9 31,34.5 ; 31,43.5 31,44.1 ; 31.4,36.1 31.4,36.8 ; 33.2,41.9 33.2,41.4 33.5,41.1 ; 34.6,36.1 34.6,36.9 ; 34.7,39.3 35.3,39.3 ; 35,33.8 35,34.5 ; 35,43.5 35,44.2 35.1,44.3 ; 36.9,37.3 37.6,37.3 ; 37.299,33.784 37.3,33.785 37.3,34.5 ; 38.7,41.9 38.7,41.6 38.9,41.4 ; 31,44.1 31,44.1
Bottom Overlay:
  drawing of 850 lines, arcs and shapes, not listed
  text "REV 1.00" at 47.6,76.5 h1.3
  text "NBP12" at 54.9,76.4 h1.3
  text "1" at 13.97,58.42 h1
  text "1" at 14.224,7.62 h1
PCB Boundary:
  the board outline again, w0.25
  text "PCB boundary coincides with centre-line of tracks and arc" at 0,-12 h0.75
Gerber ID:
  text ".Layer_Name" at 0,-6 h0.75
Printout ID:
  text ".Printout_Name" at 0,-10 h0.75
Design Information:
  drawing of 719 lines, arcs and shapes, not listed
  text "NBP12 REV1.00" at 240.157,177.165 h1.27
  text "DESIGN INFORMATION" at 184.15,177.038 h1.52
  text "BOARD NAME:" at 221.742,177.038 h1.52
  text "BOARD TECHNOLOGY" at 184.15,174.498 h1.52
  text "BOARD SIZE (REFER ALSO PROFILING INFORMATION)" at 232.41,174.498 h1.27
  text "69.00mm" at 235.13,172.224 h1.52
  text "81.00mm" at 258.13,172.124 h1.52
  text "5mil" at 186.9,172 h1.52
  text "15.748mil" at 197.7,172 h1.52
  text "5mil" at 214.9,172 h1.52
  text "X" at 251.079,171.45 h1.78
  text "(MIN. TRACK/   PADS  /   CLEARANCE     IN 0.001'')" at 182.626,169.418 h1.27
  text "MINIMUM ANNULAR RING 0.05MM (0.002'') EXTERNAL PER IPC-2221 CLASS 3 LEVEL C AND IS THE" at 184.15,166.878 h1.27
  text "MANUFACTURING REGISTRATION ALLOWANCE" at 184.15,164.592 h1.27
  text "LAND SIZE CALCULATION MINIMUM - NOMINAL HOLE SIZE + 0.508MM (0.020'')" at 184.15,161.798 h1.27
  text "AS INSTRUCTED" at 270.18,157.404 h1.52
  text "X" at 221.793,157.277 h1.52
  text "CIRCUIT TYPE:" at 184.15,157.226 h1.52
  text "SS" at 207.01,157.226 h1.27
  text "DS" at 224.79,157.226 h1.27
  text "X" at 239.395,157.226 h1.52
  text "PTH" at 242.57,157.226 h1.27
  text "ML" at 253.492,157.226 h1.27
  text "X" at 257.302,157.226 h1.52
  text "No. OFF" at 260.35,157.226 h1.27
  text "FINGER CONNECTOR DIM PER:" at 184.15,154.178 h1.52
  text "AS SHOWN" at 260.35,154.178 h1.27
  text "No. OFF TOTAL" at 200.914,151.384 h1.52
  text "ONE SIDE" at 242.57,151.384 h1.27
  text "BOTH SIDES" at 260.35,151.13 h1.27
  text "VIAS:" at 184.15,148.463 h1.52
  text "NONE" at 195.58,148.463 h1.14
  text "X" at 203.962,148.463 h1.52
  text "FEED THRU'" at 207.01,148.463 h1.14
  text "X" at 221.742,148.463 h1.52
  text "TENTED" at 224.79,148.463 h1.14
  text "BURIED LAYER SEQUENCE" at 242.57,148.463 h1.14
  text "UNIQUE DRILL" at 207.01,145.415 h1.14
  text "2 SIZE" at 224.79,145.415 h1.14
  text "BLIND LAYER SEQUENCE" at 242.57,145.415 h1.14
  text "Layer Stack Manager (Protel)" at 219.583,143.129 h1.27
  text "X" at 257.302,143.129 h1.52
  text "AS SHOWN" at 260.35,143.129 h1.27
  text "LAYER CONSTRUCTION PER:" at 184.15,143.002 h1.52
  text "Protel" at 265.176,140.462 h1.27
  text "(PFW)" at 275.463,140.335 h1.27
  text "ARTWORK:" at 184.15,140.208 h1.52
  text "MANUAL" at 207.01,140.208 h1.27
  text "DIGITISED" at 224.79,140.208 h1.27
  text "X" at 239.522,140.208 h1.52
  text "CAD" at 242.57,140.208 h1.27
  text "TYPE" at 253.492,140.208 h1.27
  text "ARTWORK/PATTERN MASTER LIST" at 184.15,135.509 h1.52
  text "DESCRIPTION" at 185.42,133.096 h1.27
  text "DRAWING No./CAD FILE REF." at 204.089,133.096 h1.27
  text "LAYER NAME" at 245.364,133.096 h1.27
  text "GERBER FILE REF" at 266.116,133.02 h1.27
  text "PCB FILE" at 183.866,130.632 h1.27
  text "BOCD_SpartanIIE_FG456" at 204.237,130.556 h1.27
  text "PcbDoc" at 235.479,130.556 h1.02
  text "Top Paste Mask" at 243.658,128.092 h1.02
  text "GTP" at 286.279,128.016 h1.27
  text "GERBER FILE" at 183.866,127.965 h1.27
  text "GTO" at 286.228,125.527 h1.27
  text "Top Overlay" at 243.658,125.501 h1.02
  text "GERBER FILE" at 183.866,125.425 h1.27
  text "Top Solder Mask" at 243.658,123.063 h1.02
  text "GTS" at 286.279,122.936 h1.27
  text "GERBER FILE" at 183.866,122.885 h1.27
  text "TOP LAYER" at 243.658,120.472 h1.02
  text "GTL" at 286.279,120.396 h1.27
  text "GERBER FILE" at 183.866,120.345 h1.27
  text "MIDLAYER1" at 243.84,118.237 h1.02
  text "G1" at 286.131,117.983 h1.27
  text "GERBER FILE" at 183.866,117.805 h1.27
  text "INTERNALPLANE1" at 243.586,115.57 h1.02
  text "GP1" at 286.131,115.443 h1.27
  text "GERBER FILE" at 183.866,115.265 h1.27
  text "BOTTOMLAYER" at 243.658,112.852 h1.02
  text "GBL" at 286.279,112.776 h1.27
  text "GERBER FILE" at 183.866,112.725 h1.27
  text "Bottom Solder Mask" at 243.658,110.363 h1.02
  text "GBS" at 286.279,110.236 h1.27
  text "GERBER FILE" at 183.866,110.185 h1.27
  text "Bottom Overlay" at 243.658,107.772 h1.02
  text "GBO" at 286.279,107.696 h1.27
  text "GERBER FILE" at 183.866,107.645 h1.27
  text "Bottom Paste Mask" at 243.658,105.283 h1.02
  text "GBP" at 286.279,105.156 h1.27
  text "GERBER FILE" at 183.866,105.105 h1.27
  text "PCB Boundary" at 243.658,102.692 h1.02
  text "GM1" at 286.279,102.616 h1.27
  text "GERBER FILE" at 183.866,102.565 h1.27
  text "APERTURE LIST" at 183.866,100.152 h1.27
  text "APR" at 236.479,100.076 h1.27
  text "DRILL REPORT" at 183.866,97.612 h1.27
  text "DRR" at 236.479,97.536 h1.27
  text "EXCELLON DRILL" at 183.866,95.072 h1.27
  text "TXT" at 236.479,94.996 h1.27
  text "MATERIAL:" at 184.15,74.422 h1.52
  text "GLASS FIBRE EPOXY RESIN NEMA GRADE FR4 (MIL-S-13949H)" at 209.804,74.168 h1.27
  text "X" at 207.137,74.041 h1.52
  text "THICKNESS:" at 192.024,71.247 h1.27
  text "0.8mm" at 209.804,71.247 h1.27
  text "1.2mm" at 227.457,71.247 h1.27
  text "1.6mm" at 245.11,71.247 h1.27
  text "2.4mm" at 262.89,71.247 h1.27
  text "3.2mm" at 280.67,71.247 h1.27
  text "X" at 242.697,71.12 h1.52
  text "TOLERANCE:" at 191.897,68.199 h1.27
  text "IN A/W IPC-D-300G CLASS" at 209.55,68.199 h1.27
  text "3 LEVEL B" at 244.475,68.199 h1.27
  text "OTHER +/-" at 262.89,68.199 h1.27
  text "X" at 207.137,68.072 h1.52
  text "BOW & TWIST:" at 189.484,65.151 h1.27
  text "IN A/W IPC-D-300G CLASS" at 209.55,65.151 h1.27
  text "3 LEVEL B" at 244.475,65.151 h1.27
  text "AS SHOWN" at 263.017,65.024 h1.27
  text "X" at 207.137,64.897 h1.52
  text "COPPER THICKNESS (FINISHED)" at 191.897,61.849 h1.27
  text "OUTER:" at 196.723,59.563 h1.27
  text "18um" at 209.804,59.563 h1.27
  text "35um" at 236.855,59.563 h1.27
  text "70um" at 263.144,59.563 h1.27
  text "X" at 234.112,59.36 h1.52
  text "INNER SIGNAL:" at 188.341,56.515 h1.27
  text "18um" at 209.804,56.515 h1.27
  text "35um" at 236.855,56.515 h1.27
  text "70um" at 263.144,56.515 h1.27
  text "X" at 234.061,56.312 h1.52
  text "INNER PWR:" at 192.024,53.467 h1.27
  text "18um" at 209.804,53.467 h1.27
  text "35um" at 236.855,53.467 h1.27
  text "70um" at 263.144,53.467 h1.27
  text "X" at 234.188,53.34 h1.52
  text "STRUCTURE:" at 184.15,50.419 h1.52
  text "REFER" at 209.804,50.419 h1.27
  text "AS PER DRAWING No." at 209.677,47.244 h1.27
  text "AS SHOWN" at 263.017,47.244 h1.27
  text "X" at 260.477,47.117 h1.52
  text "DRILLING:" at 184.15,44.45 h1.52
  text "VIEWED FROM:" at 189.103,42.164 h1.27
  text "COMPONENT SIDE" at 209.804,42.164 h1.14
  text "SOLDER SIDE" at 236.601,42.164 h1.14
  text "X" at 207.137,41.91 h1.52
  text "REFERENCE:" at 191.389,39.116 h1.27
  text "AS SHOWN" at 209.677,38.989 h1.14
  text "PATTERN MASTER LIST" at 236.728,38.989 h1.14
  text "X" at 260.477,38.989 h1.52
  text "NC_DRILL FILES" at 263.017,38.989 h1.14
  text "X" at 207.137,38.862 h1.52
  text "PTH MINIMUM COPPER THICKNESS:" at 197.231,36.068 h1.27
  text "20um" at 236.855,36.068 h1.27
  text "X" at 234.188,35.941 h1.52
  text "OTHER" at 263.017,35.941 h1.27
  text "NPTH:" at 197.739,33.02 h1.27
  text "TENTED" at 209.677,32.893 h1.14
  text "X" at 234.188,32.893 h1.52
  text "PADS REMOVED" at 236.728,32.893 h1.14
  text "REMOVE PADS" at 263.017,32.893 h1.14
  text "X" at 207.137,32.766 h1.52
  text "2nd DRILL" at 209.677,29.845 h1.14
  text "BOTH" at 236.728,29.845 h1.14
  text "AS SHOWN" at 249.047,29.845 h1.14
  text "NONE" at 263.017,29.845 h1.14
  text "BOARD FINISH:" at 184.15,26.924 h1.52
  text "X" at 207.137,26.797 h1.52
  text "ETCHING" at 209.677,26.797 h1.14
  text "REFER PATTERN MASTER LIST" at 236.728,26.797 h1.14
  text "LEGEND / SCREEN PRINT:" at 204.47,23.876 h1.27
  text "NONE" at 236.728,23.749 h1.14
  text "COMPONENT" at 249.047,23.749 h1.14
  text "SOLDER" at 263.017,23.749 h1.14
  text "X" at 246.507,23.622 h1.52
  text "X" at 260.477,23.622 h1.52
  text "COLOUR:" at 194.691,20.828 h1.27
  text "WHITE" at 209.677,20.701 h1.14
  text "YELLOW" at 236.728,20.701 h1.14
  text "OTHER" at 263.017,20.701 h1.14
  text "X" at 207.137,20.574 h1.52
  text "X" at 207.137,17.653 h1.52
  text "LIQUID PHOTOIMAGEABLE" at 209.677,17.653 h1.14
  text "SCREEN PRINT" at 249.047,17.653 h1.14
  text "MATTE" at 209.677,14.605 h1.14
  text "GLOSS" at 222.377,14.605 h1.14
  text "GREEN" at 236.728,14.605 h1.14
  text "BLUE" at 249.047,14.605 h1.14
  text "G/Y" at 263.017,14.605 h1.14
  text "OTHER" at 274.447,14.605 h1.14
  text "X" at 219.71,14.478 h1.52
  text "SOLDER MASK COLOUR:" at 184.15,11.684 h1.14
  text "BLACK" at 209.677,11.557 h1.14
  text "GREEN" at 222.377,11.557 h1.14
  text "YELLOW" at 236.728,11.557 h1.14
  text "BLUE" at 249.047,11.557 h1.14
  text "OTHER" at 263.017,11.557 h1.14
  text "X" at 207.01,11.43 h1.52
  text "TRACK FINISH:" at 184.15,8.636 h1.52
  text "SELECTIVE SOLDER (HASL)" at 209.677,8.509 h1.14
  text "REFLOW SOLDER" at 249.047,8.509 h1.14
  text "SELECTIVE GOLD" at 209.677,5.461 h1.14
  text "um  (AREA" at 236.728,5.461 h1.14
  text "sq. mm)" at 264.541,5.461 h1.14
  text "GOLD PLATED AS PER SAMPLE" at 256.159,3.175 h1.27
  text "REFER PATTERN MASTER LIST" at 209.677,2.413 h1.14
  text "X" at 246.507,2.413 h1.52
  text "OTHER" at 249.047,2.413 h1.14
  text "EDGE BOARD" at 184.15,-0.508 h1.52
  text "1.3um HARD GOLD OVER 5um     NICKEL / TIN-NICKEL" at 209.677,-0.635 h1.14
  text "CONTACTS:" at 184.15,-2.667 h1.52
  text "HARD FINISH GOLDE PLATE" at 209.677,-3.683 h1.14
  text "OTHER" at 249.047,-3.683 h1.14
  text "AS SHOWN" at 209.677,-6.731 h1.14
  text "REFER" at 249.047,-6.731 h1.14
  text "PROFILING:" at 184.15,-9.779 h1.52
  text "AS DIMENSIONED, MEASURED AND CUT FROM SPECIFIED DATUM." at 209.677,-9.779 h1.14
  text "X" at 207.137,-9.906 h1.52
  text "REFER PCB BLANK DWG No." at 209.804,-12.7 h1.27
  text "USE PROFILE / ROUTE TAPE SUPPLIED (REFER PATTERN MASTER LIST)" at 209.804,-15.748 h1.27
  text "SQUARE CUT" at 209.804,-18.796 h1.27
  text "N.C. ROUTE" at 227.584,-18.796 h1.27
  text "V. SCORE" at 245.364,-18.796 h1.27
  text "BLANK" at 263.144,-18.796 h1.27
  text "ACCEPTABILITY:" at 184.15,-21.463 h1.52
  text "MATERIALS AND WORKMANSHIP FOR ALL PRINTED WIRING BOARDS TO MEET" at 206.375,-21.59 h1.27
  text "OR EXCEED THE REQUIREMENTS OF:" at 206.375,-24.384 h1.27
  text "IPC-6011/12 AND IPC-A-600E" at 209.931,-27.051 h1.27
  text "1" at 245.491,-27.051 h1.27
  text "2" at 254.381,-27.051 h1.27
  text "X" at 251.714,-27.178 h1.52
  text "X" at 207.264,-27.305 h1.52
  text "3" at 263.271,-29.21 h1.27
  text "UL CERTIFICATION" at 209.931,-30.099 h1.27
  text "AUSTEL" at 245.491,-30.099 h1.27
  text "X" at 207.264,-30.226 h1.52
  text "ML-P-55110F GRP" at 209.423,-33.147 h1.02
  text "A" at 227.711,-33.147 h1.27
  text "B" at 236.601,-33.147 h1.27
  text "AS2546" at 245.491,-33.147 h1.27
  text "OTHER" at 263.271,-33.147 h1.27
  text "ADDITIONAL" at 184.15,-36.068 h1.52
  text "NONE" at 209.931,-36.322 h1.27
  text "SAMPLE PLAN" at 227.711,-36.322 h1.27
  text "MIL-P-55110E SERIAL Nos. PER ORDER" at 245.491,-36.322 h1.27
  text "REQUIREMENTS:" at 184.15,-38.481 h1.52
  text "NONE" at 209.931,-39.37 h1.27
  text "ML-P-55110F GRP" at 227.203,-39.37 h1.02
  text "A" at 245.491,-39.37 h1.27
  text "B" at 254.381,-39.37 h1.27
  text "IPC CLASS:" at 260.35,-39.37 h1.27
  text "1" at 275.844,-39.37 h1.27
  text "2" at 282.194,-39.37 h1.27
  text "3" at 288.544,-39.37 h1.27
  text "QUALITY RELEASE REPORT" at 227.711,-42.418 h1.27
  text "OTHER" at 268.224,-42.418 h1.27
  text "PER ORDER" at 276.733,-42.545 h1.27
  text "X" at 265.557,-42.672 h1.52
  text "NONE" at 227.711,-45.466 h1.27
  text "REQUIRED" at 245.491,-45.466 h1.27
  text "PER ORDER" at 268.351,-45.466 h1.27
  text "ELECTRICAL TEST:" at 184.15,-45.593 h1.52
  text "X" at 242.824,-45.593 h1.52
  text "NONE" at 227.711,-48.514 h1.27
  text "1 SIDE" at 245.364,-48.514 h1.14
  text "2 SIDES" at 256.54,-48.514 h1.14
  text "MIN. PITCH" at 268.224,-48.514 h1.27
  text "0.65mm" at 281.813,-48.514 h1.27
  text "SURFACE MOUNT:" at 184.15,-48.641 h1.52
  text "X" at 254.305,-48.717 h1.52
  text "NONE" at 227.711,-51.562 h1.27
  text "FOIL" at 245.491,-51.562 h1.27
  text "LEGEND" at 256.921,-51.562 h1.27
  text "REFER" at 268.224,-51.562 h1.27
  text "MANUFACTURER'S ID/LOGO:" at 184.15,-51.689 h1.52
  text "X" at 225.044,-51.816 h1.52
  text "ISO9001/AS3901" at 231.521,-54.61 h1.27
  text "NONE" at 268.224,-54.61 h1.27
  text "MANUFACTURER'S ACCREDITATION:" at 184.15,-54.737 h1.52
  text "X" at 228.854,-54.737 h1.52
  text "PER ORDER" at 227.711,-57.658 h1.27
  text "REFER" at 245.491,-57.658 h1.27
  text "PACKAGING AND HANDLING:" at 184.15,-57.785 h1.52
  text "X" at 225.044,-57.912 h1.52
Sheet:
  drawing of 1882 lines, arcs and shapes, not listed
  text "1" at -72.483,181.991 h1.78
  text "2" at -23.444,181.991 h1.78
  text "3" at 25.815,181.991 h1.78
  text "4" at 75.108,181.991 h1.78
  text "5" at 124.384,181.991 h1.78
  text "6" at 173.406,181.991 h1.78
  text "7" at 222.936,181.991 h1.78
  text "8" at 271.958,181.991 h1.78
  text "A" at -94.615,148.006 h1.78
  text "A" at 294.005,148.006 h1.78
  text "B" at -94.615,77.394 h1.78
  text "B" at 294.005,77.394 h1.78
  text "C" at -94.615,6.782 h1.78
  text "C" at 294.005,6.782 h1.78
  text "D" at -94.615,-63.322 h1.78
  text "D" at 294.005,-63.322 h1.78
  text "ENGINEER:" at 179.07,-63.5 h1.14
  text "TITLE:" at 217.17,-63.5 h1.14
  text "PCB DESIGNER:" at 179.07,-70.993 h1.14
  text "DATE:" at 179.07,-78.74 h1.14
  text "PART NO.:" at 217.17,-78.74 h1.14
  text "REV:" at 270.51,-78.74 h1.14
  text "Altium Limited" at 146.05,-81.28 h1.78
  text ".PRINT_DATE" at 180.34,-81.788 h1.78
  text "12a Rodborough Rd" at 146.05,-83.82 h1.78
  text "Frenchs Forest" at 146.05,-86.36 h1.78
  text "FILE NAME:" at 179.07,-86.36 h1.14
  text "DWG NO:" at 217.17,-86.36 h1.14
  text "SCALE:" at 270.51,-86.36 h1.14
  text "NSW 2086" at 146.05,-88.9 h1.78
  text ".PCB_FILE_NAME_NO_PATH" at 180.34,-89.408 h1.78
  text "1" at -72.483,-94.869 h1.78
  text "2" at -23.444,-94.869 h1.78
  text "3" at 25.815,-94.869 h1.78
  text "4" at 75.108,-94.869 h1.78
  text "5" at 124.384,-94.869 h1.78
  text "6" at 173.406,-94.869 h1.78
  text "7" at 222.936,-94.869 h1.78
  text "8" at 271.958,-94.869 h1.78
Drill Drawing:
  text ".Legend" at 0,-8 h0.75

## Dimensions
0,0 to 69,0 on Dimensions
0,0 to 0.001,77 on Dimensions
34.5,-69.801 to 39.6,85.2 on Dimensions